# EAGLE board PCB-verbesserung_2025-05-29.PCB (EAGLE 9.6.2)
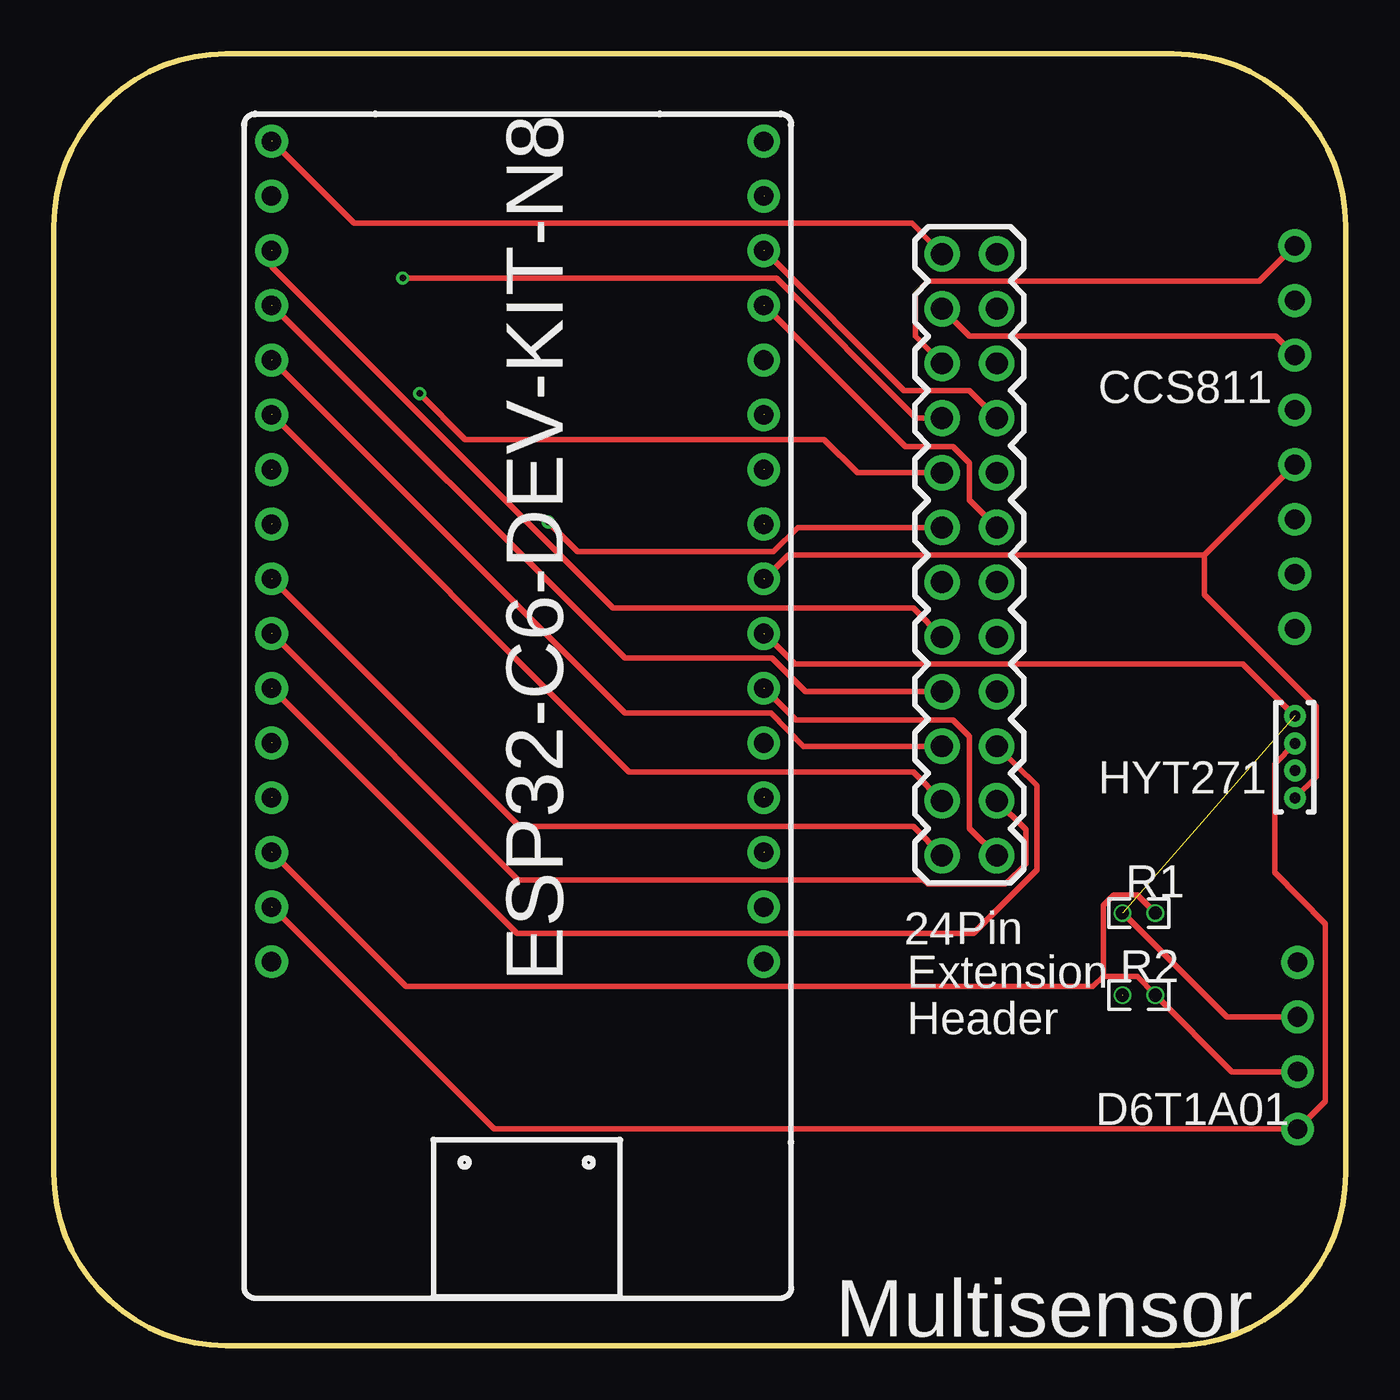
[diagram p0: board, top side]
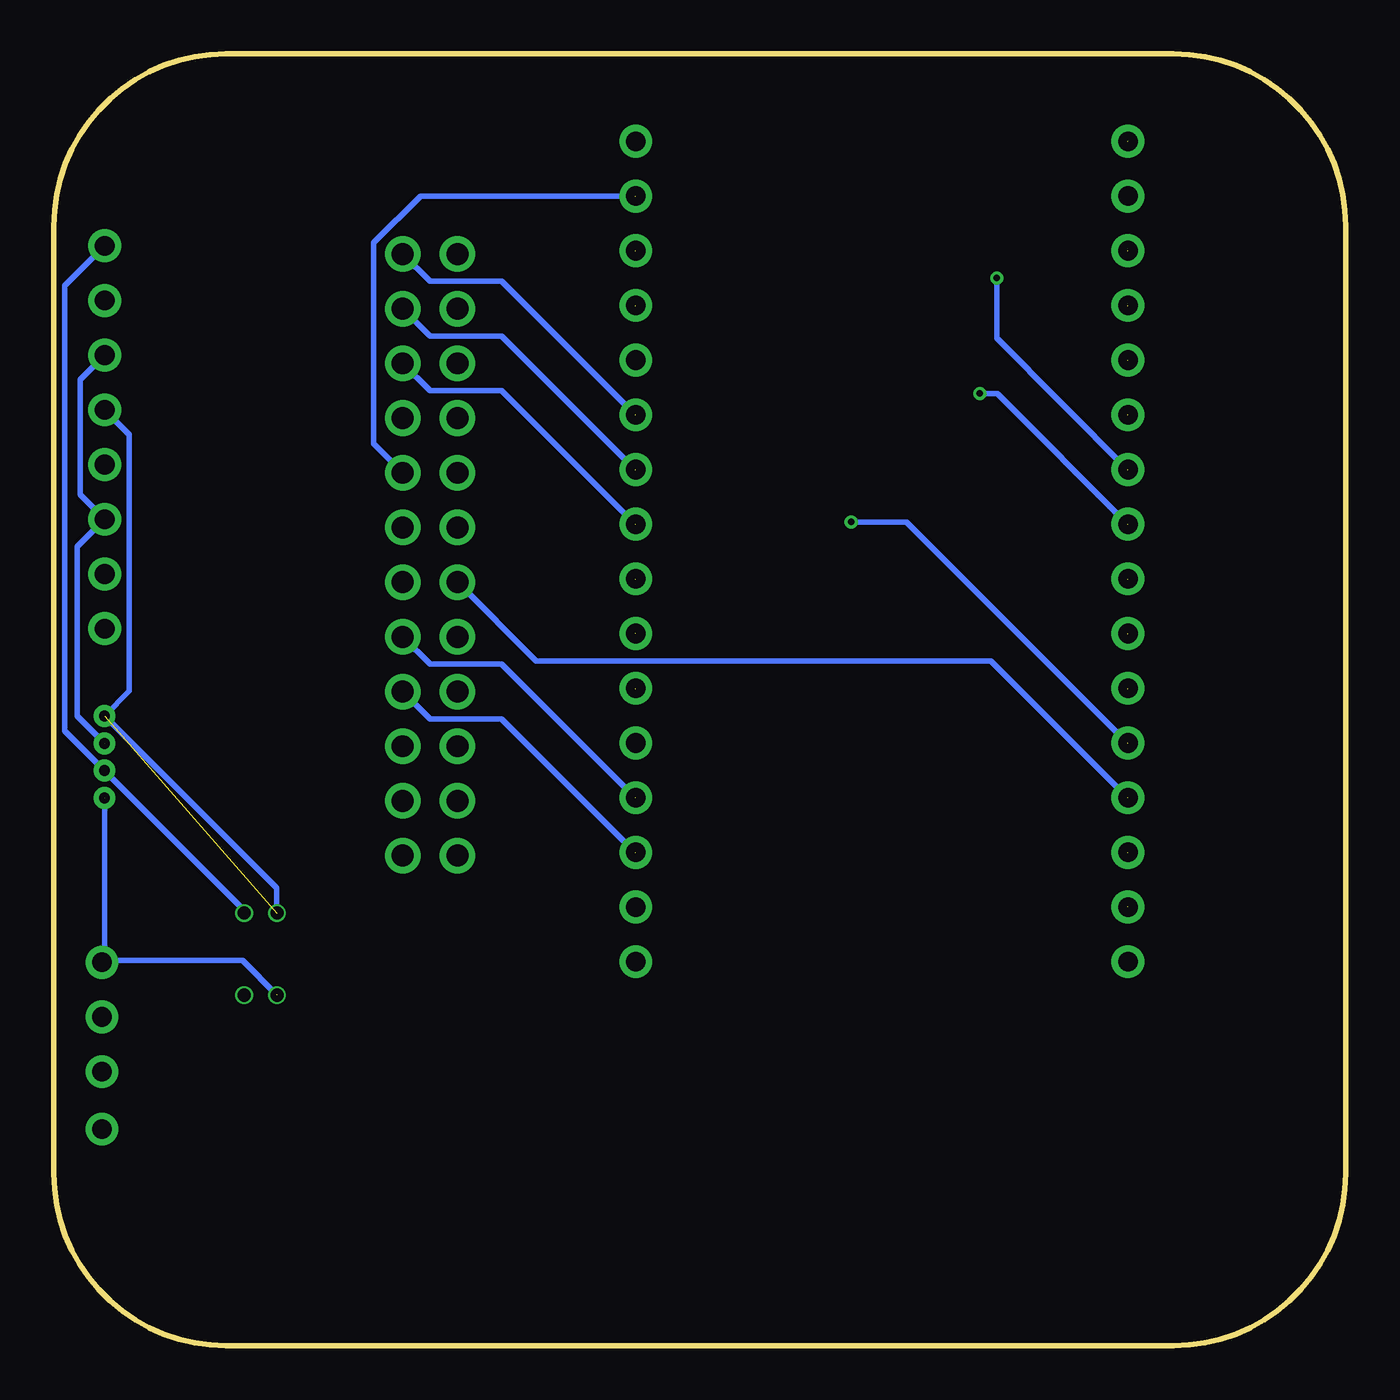
[diagram p1: board, bottom side, seen from below]

Size 59.99 x 59.99 mm. Coordinates in mm from the lower left corner, seen from the top.
Outline: 59.99,51.99 arc90 51.99,59.99 8,59.99 arc90 0,51.99 0,8 arc90 8,0 51.99,0 arc90 59.99,8 59.99,51.99
Copper layers (1*16): Top 0.035mm / dielectric 1.5mm / Bottom 0.035mm
Design rules "PCB-verbesserung_2025-05-29": minimum track width 6mil, minimum drill 0.35mm, track to track 6mil, track to pad 6mil, pad to pad 6mil, via to via 6mil, smd to smd 6mil, copper to edge 40mil, drill to drill 6mil, minimum pad ring 0mil, minimum via ring 0mil, stop-mask expansion 4mil, vias tented up to drill 0mil, thermal gap 10mil

## Footprints (pad centres in the part's own frame; a part is rotated, then mirrored left to right if it is on the bottom)
PIN-HEADER-210S-2X12P_WK_1PRIMARY = drill 1.016 pad 1.651: 1 -3.81,0; 2 -1.27,0; 3 1.27,0; 4 3.81,0; 5 6.35,0; 6 8.89,0; 7 11.43,0; 8 13.97,0; 9 16.51,0; 10 19.05,0; 11 21.59,0; 12 24.13,0; 13 -3.81,-2.54; 14 -1.27,-2.54; 15 1.27,-2.54; 16 3.81,-2.54; 17 6.35,-2.54; 18 8.89,-2.54; 19 11.43,-2.54; 20 13.97,-2.54; 21 16.51,-2.54; 22 19.05,-2.54; 23 21.59,-2.54; 24 24.13,-2.54
CCS811_JOY-IT_1PRIMARY = drill 0.914 pad 1.524: 1 0,0; 2 0,-2.54; 3 0,-5.08; 4 0,-7.62; 5 0,-10.16; 6 0,-12.7; 7 0,-15.24; 8 0,-17.78
D6T1A01_1PRIMARY = drill 0.914 pad 1.524: 1 0,0; 2 0,-2.54; 3 0,-5.08; 4 0,-7.747
P:EX40Y40D201 = drill 0.508 pad 1.016: 1 0,0
P:EX126Y126D1261 = drill 3.2 pad 3.2: 1 0,0
ESP32-C6-DEV-KIT-N8_1PRIMARY = drill 0.914 pad 1.524: 1 0.102,0.025; 2 0.102,-2.515; 3 0.102,-5.055; 4 0.102,-7.595; 5 0.102,-10.135; 6 0.102,-12.675; 7 0.102,-15.215; 8 0.102,-17.755; 9 0.102,-20.295; 10 0.102,-22.835; 11 0.102,-25.375; 12 0.102,-27.915; 13 0.102,-30.455; 14 0.102,-32.995; 15 0.102,-35.535; 16 0.102,-38.075; 17 22.962,-38.075; 18 22.962,-35.535; 19 22.962,-32.995; 20 22.962,-30.455; 21 22.962,-27.915; 22 22.962,-25.375; 23 22.962,-22.835; 24 22.962,-20.295; 25 22.962,-17.755; 26 22.962,-15.215; 27 22.962,-12.675; 28 22.962,-10.135; 29 22.962,-7.595; 30 22.962,-5.055; 31 22.962,-2.515; 32 22.962,0.025
R0603_1PRIMARY = drill 0.61 pad 0.813: 1 -0.762,0; 2 0.762,0

## Placement (x,y rotation side)
24  2X12_PIN_HEADER_MALE  [PIN-HEADER-210S-2X12P_WK_1PRIMARY]  43.79,46.89 270 top
CCS811  CCS811_Joy-It  [CCS811_JOY-IT_1PRIMARY]  57.63,51.08 0 top
D6T1A01  D6T1A01  [D6T1A01_1PRIMARY]  57.76,17.81 0 top
DUMMY1  [P:EX40Y40D201]  57.64,29.24 0 top
DUMMY2  [P:EX40Y40D201]  57.64,27.98 0 top
DUMMY3  [P:EX40Y40D201]  57.64,26.71 0 top
DUMMY4  [P:EX40Y40D201]  57.64,25.44 0 top
DUMMY5  [P:EX126Y126D1261]  5.06,54.9 0 top
DUMMY6  [P:EX126Y126D1261]  5.06,4.86 0 top
DUMMY7  [P:EX126Y126D1261]  54.98,4.86 0 top
DUMMY8  [P:EX126Y126D1261]  54.98,54.9 0 top
ESP32C6  ESP32-C6-DEV-KIT  [ESP32-C6-DEV-KIT-N8_1PRIMARY]  10.01,55.91 0 top
HYT271  HYT271  [HYT271_1PRIMARY]  57.63,29.24 270 top
QUFVJSCI  [QUFVJSCI_1PRIMARY]  61.04,27.33 0 top
R1  4,7k  [R0603_1PRIMARY]  50.39,20.09 0 top
R2  4,7k  [R0603_1PRIMARY]  50.39,16.28 0 top

## Library data of the parts
24 CCS811 D6T1A01 DUMMY1-DUMMY8 ESP32C6 HYT271 QUFVJSCI R1 R2 = PCB-verbesserung_2025-05-29

## Nets
3V3: 24.13 ESP32C6.1
5V0: 24.15 CCS811.1 D6T1A01.3 ESP32C6.14 R1.2 R2.2
GND: 24.14 CCS811.3 CCS811.6 D6T1A01.4 ESP32C6.15
GPIO0: 24.16 ESP32C6.7
GPIO1: 24.17 ESP32C6.8
GPIO2: 24.18 ESP32C6.12
GPIO3: 24.19 ESP32C6.13
GPIO4: 24.20 ESP32C6.3
GPIO5: 24.21 ESP32C6.4
GPIO6: 24.22 ESP32C6.5
GPIO7: 24.23 ESP32C6.6
GPIO8: 24.24 ESP32C6.9
GPIO9: 24.12 ESP32C6.22
GPIO10: 24.11 ESP32C6.10
GPIO11: 24.10 ESP32C6.11
GPIO12: 24.9 ESP32C6.19
GPIO13: 24.8 ESP32C6.20
GPIO14: 24.7
GPIO15: 24.6 ESP32C6.29
GPIO16: 24.5 ESP32C6.31
GPIO17: 24.4 ESP32C6.30
GPIO20: 24.3 ESP32C6.25
GPIO21: 24.2 ESP32C6.26
GPIO22: 24.1 ESP32C6.27
SCL: CCS811.5 D6T1A01.1 ESP32C6.24 R2.1
SDA: CCS811.4 D6T1A01.2 ESP32C6.23 R1.1

## Tracks (layer width: path | path; a pad name or v marks a point on that pad's centre or on a via)
3V3  (1 unrouted)
  Top 0.254: 10.14,55.93 13.95,52.12 39.85,52.12 24.13
5V0  (1 unrouted)
  Top 0.254: D6T1A01.3 54.71,12.73 R2.2 50.32,17.15 48.74,17.15 | 24.15 40.01,46.89 40.01,48.84 40.59,49.43 55.98,49.43 CCS811.1 | 48.74,17.15 48.74,20.45 49.23,20.93 50.32,20.93 R1.2 | 10.14,22.91 16.36,16.69 48.26,16.69 48.74,17.15
  Bottom 0.254: R1.2 51.16,20.22 59.49,28.55 59.49,49.23 CCS811.1
GND  (2 unrouted)
  Top 0.254: 24.14 42.52,46.89 56.74,46.89 CCS811.3 | 10.14,20.37 20.45,10.06 D6T1A01.4 59.05,11.35 59.05,19.58 56.69,21.97 56.69,27.03 57.63,27.96
  Bottom 0.254: CCS811.3 58.78,44.86 58.78,39.52 CCS811.6 58.9,37.11 58.9,29.24 57.63,27.96
GPIO0  (via drill 0.31 pad 0.61)  (1 unrouted)
  Top 0.254: 24.16 40.03,43.08 33.55,49.58 v16.21,49.58
  Bottom 0.254: 10.14,40.69 16.21,46.79 v16.21,49.58
GPIO1  (via drill 0.31 pad 0.61)  (1 unrouted)
  Top 0.254: v16.99,44.22 19.1,42.09 35.76,42.09 37.31,40.54 24.17
  Bottom 0.254: 10.14,38.15 16.18,44.22 v16.99,44.22
GPIO2  (via drill 0.31 pad 0.61)  (1 unrouted)
  Top 0.254: 24.18 34.57,38 33.43,36.88 24.33,36.88 v22.96,38.25
  Bottom 0.254: 10.14,27.99 20.4,38.25 v22.96,38.25
GPIO3  (1 unrouted)
  Bottom 0.254: 10.14,25.45 16.49,31.8 37.59,31.8 24.19
GPIO4  (1 unrouted)
  Top 0.254: 10.14,50.85 10.14,50.09 25.96,34.27 39.93,34.27 24.20
GPIO5  (1 unrouted)
  Top 0.254: 10.14,48.31 26.52,31.93 33.35,31.93 34.9,30.38 24.21
GPIO6  (1 unrouted)
  Top 0.254: 10.14,45.77 26.52,29.39 33.3,29.39 34.82,27.84 24.22
GPIO7  (1 unrouted)
  Top 0.254: 10.14,43.23 26.72,26.65 39.93,26.65 24.23
GPIO8  (1 unrouted)
  Top 0.254: 10.14,35.61 21.64,24.11 39.93,24.11 24.24
GPIO9  (1 unrouted)
  Top 0.254: 32.99,30.53 34.47,29.06 41.76,29.06 42.52,28.3 42.52,24.03 24.12
GPIO10  (1 unrouted)
  Top 0.254: 10.14,33.07 21.57,21.64 40.39,21.64 40.59,21.44 44.2,21.44 45.14,22.38 45.14,23.98 24.11
GPIO11  (1 unrouted)
  Top 0.254: 10.14,30.53 21.51,19.15 42.7,19.15 45.64,22.1 45.64,26.01 24.10
GPIO12  (1 unrouted)
  Bottom 0.254: 32.99,22.91 39.19,29.11 42.52,29.11 24.9
GPIO13  (1 unrouted)
  Bottom 0.254: 32.99,25.45 39.19,31.65 42.52,31.65 24.8
GPIO15  (1 unrouted)
  Top 0.254: 32.99,48.31 39.55,41.76 41.76,41.76 42.52,41 42.52,39.27 24.6
GPIO16  (1 unrouted)
  Bottom 0.254: 32.99,53.39 42.95,53.39 45.14,51.23 45.14,41.88 24.5
GPIO17  (1 unrouted)
  Top 0.254: 32.99,50.85 39.47,44.35 42.52,44.35 24.4
GPIO20  (1 unrouted)
  Bottom 0.254: 32.99,38.15 39.19,44.35 42.52,44.35 24.3
GPIO21  (1 unrouted)
  Bottom 0.254: 32.99,40.69 39.19,46.89 42.52,46.89 24.2
GPIO22  (1 unrouted)
  Bottom 0.254: 24.1 42.52,49.43 39.19,49.43 32.99,43.23
SCL  (3 unrouted)
  Top 0.254: 53.44,36.73 53.44,34.87 58.62,29.69 58.62,26.42 57.63,25.43 | 32.99,35.61 34.11,36.73 53.44,36.73 | 53.44,36.73 CCS811.5
  Bottom 0.254: 57.63,17.88 57.63,25.43 | D6T1A01.1 57.71,17.88 57.63,17.88 | 57.63,17.88 51.23,17.88 49.66,16.28
SDA  (4 unrouted)
  Top 0.254: D6T1A01.2 54.48,15.27 49.66,20.09 | 32.99,33.07 34.42,31.65 55.22,31.65 57.63,29.24
  Bottom 0.254: CCS811.4 56.49,42.32 56.49,30.4 57.63,29.24 49.66,21.26 49.66,20.09

## Text on the board
tPlace: Pin | Extension | Header | Multisensor